# Altium PCB PCB_Luciferin_Module_V2.1_final.pcbdoc
Units mil, origin at the board's own origin, x right, y up, seen from the top; angles counter-clockwise.
Board outline 2185 x 2500 mil, 2 copper layers (Top Layer, Bottom Layer); 27 components, 50 nets, 59 pads, 48 vias.
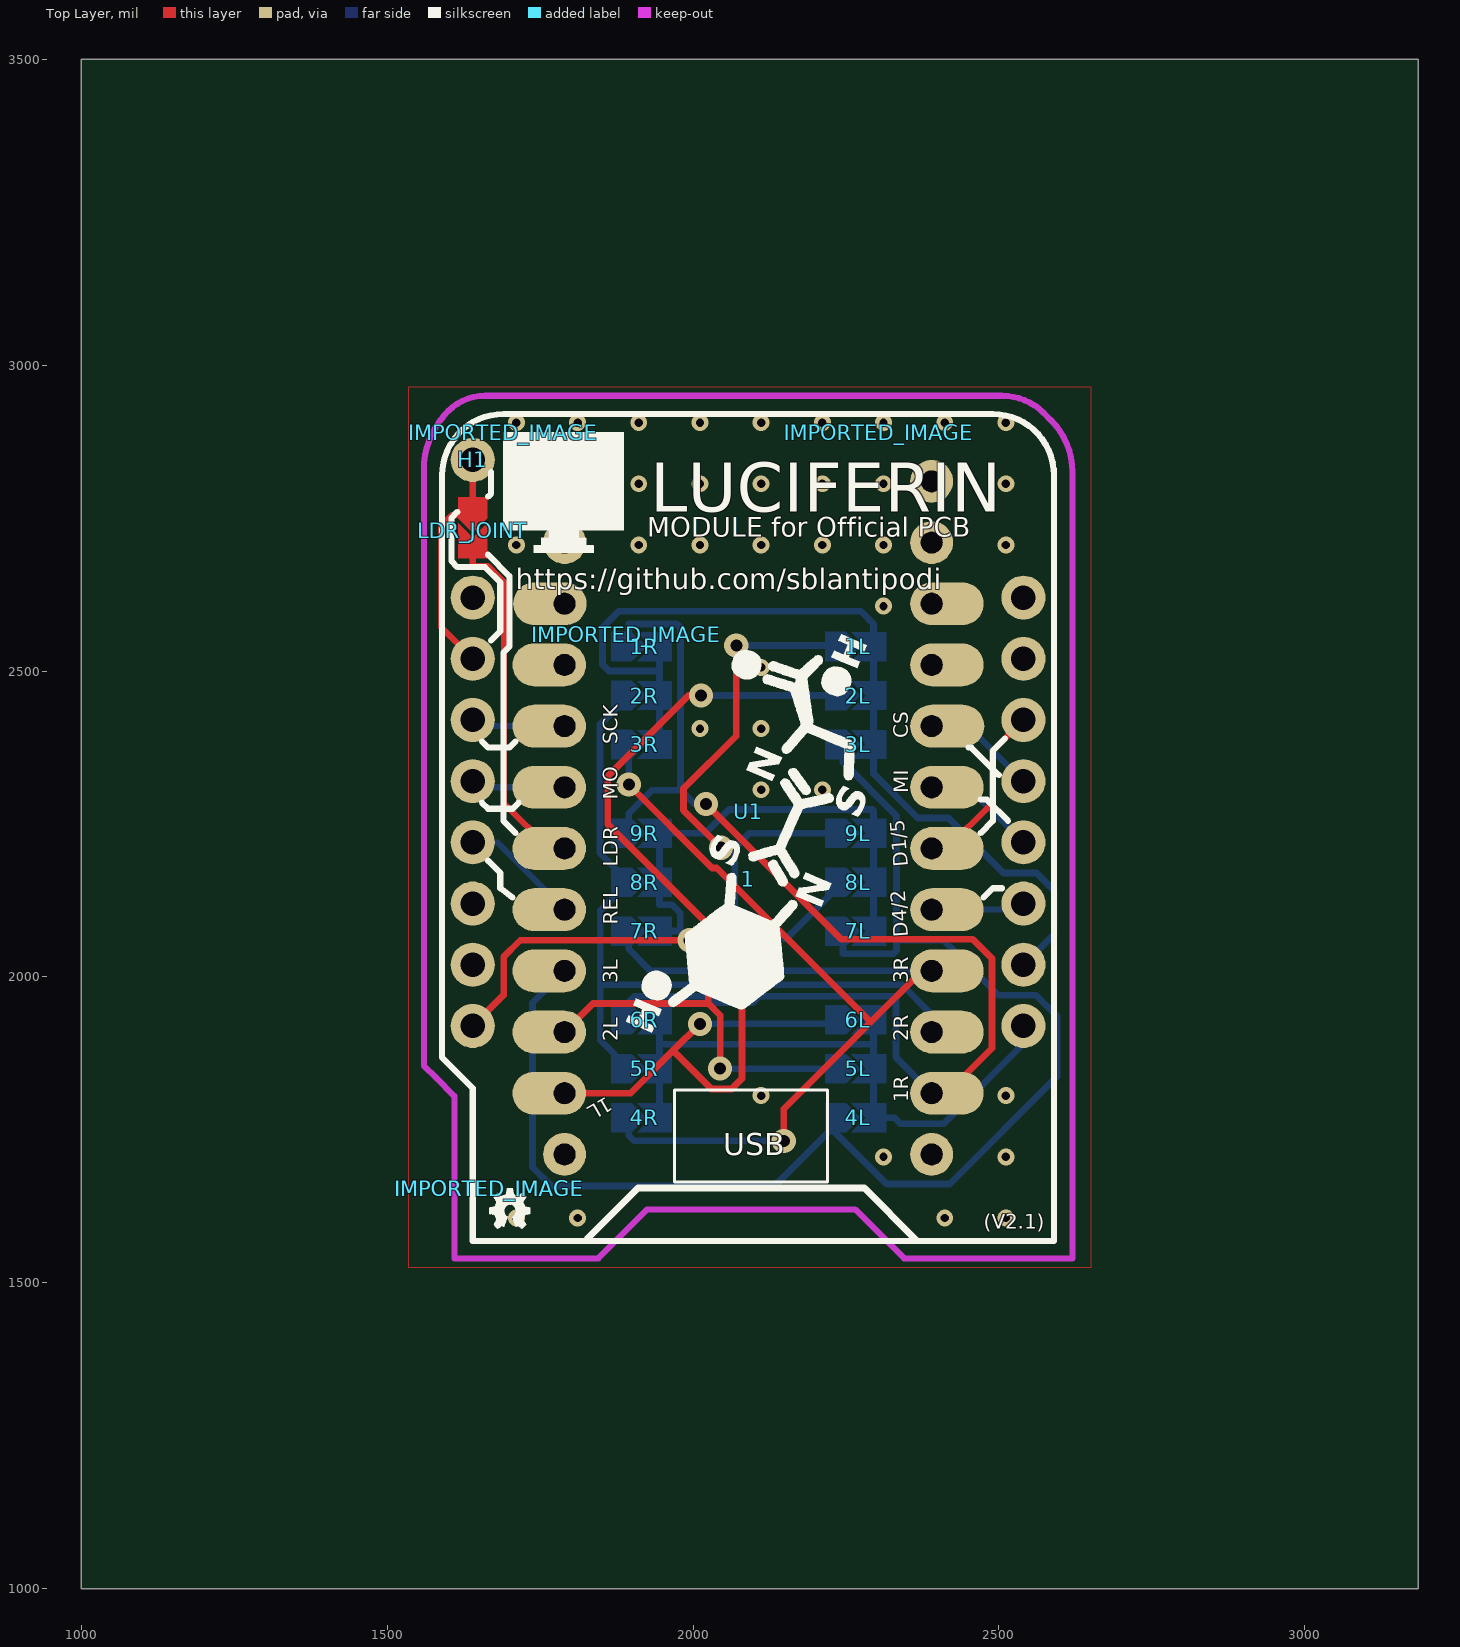
[diagram p0: Top Layer view]
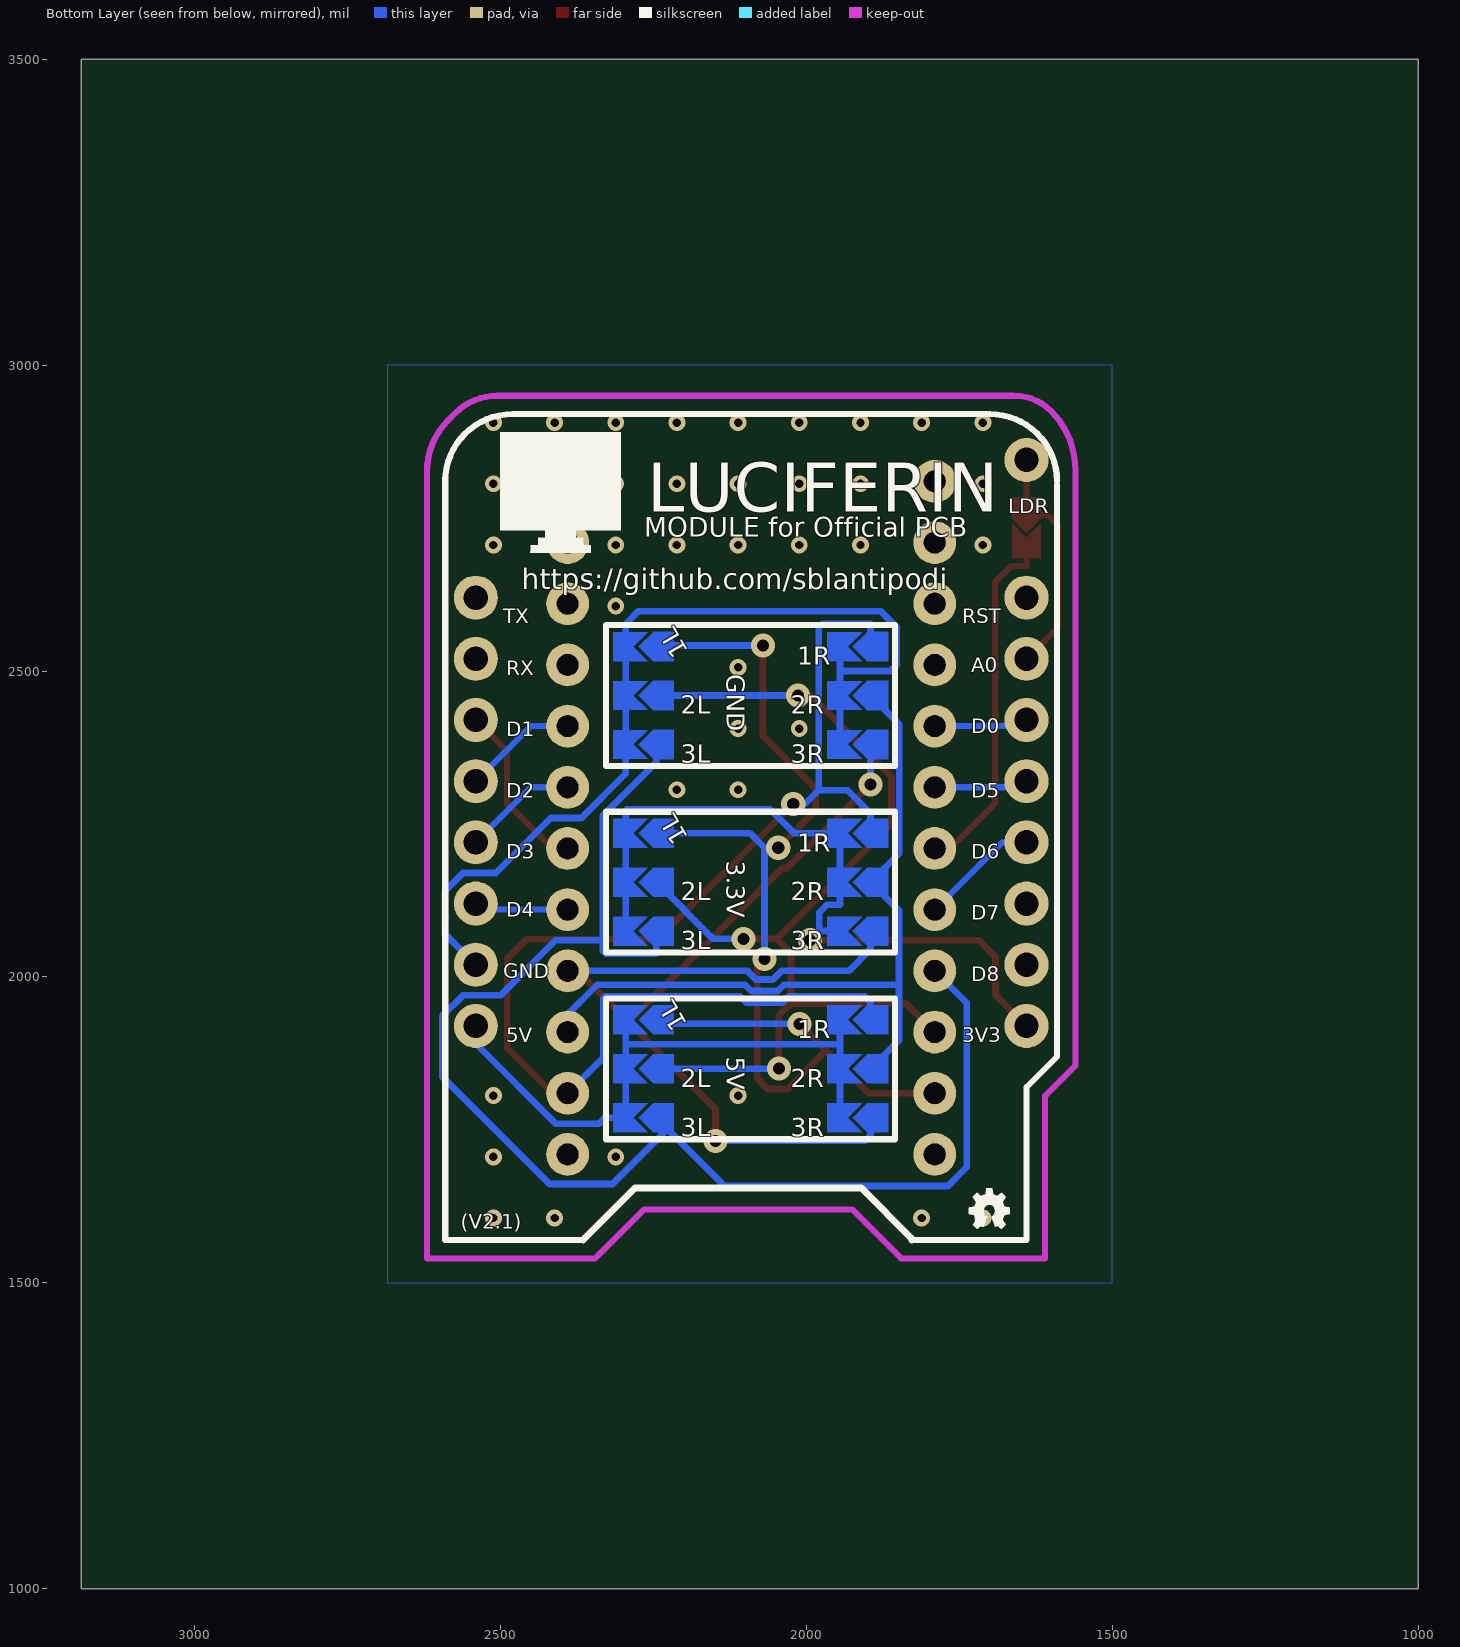
[diagram p1: Bottom Layer view, seen from below]

## Layer stack, top to bottom
Top Layer: signal copper (thickness not stored)
Dielectric: dielectric 12.6, FR-4, Dk 4.8
Bottom Layer: signal copper (thickness not stored)

## Board outline
3185,1000 1000,1000 1000,3500 3185,3500

## Components (designator, comment, footprint, x,y, rotation, side; value= is the part's Value field where it differs from the comment)
1 "SBLANT_TINYPICO_V3" TINYPICOV3 2090,2235 r90 top
1L "Solder_joint" SB_SOLDER_JOINT#1 2270,2540 r0 top
1R "Solder_joint" SB_SOLDER_JOINT#1 1920,2540 r0 top
2L "Solder_joint" SB_SOLDER_JOINT#1 2270,2460 r0 top
2R "Solder_joint" SB_SOLDER_JOINT#1 1920,2460 r0 top
3L "Solder_joint" SB_SOLDER_JOINT#1 2270,2380 r0 top
3R "Solder_joint" SB_SOLDER_JOINT#1 1920,2380 r0 top
4L "Solder_joint" SB_SOLDER_JOINT#1 2270,1770 r0 top
4R "Solder_joint" SB_SOLDER_JOINT#1 1920,1770 r0 top
5L "Solder_joint" SB_SOLDER_JOINT#1 2270,1850 r0 top
5R "Solder_joint" SB_SOLDER_JOINT#1 1920,1850 r0 top
6L "Solder_joint" SB_SOLDER_JOINT#1 2270,1930 r0 top
6R "Solder_joint" SB_SOLDER_JOINT#1 1920,1930 r0 top
7L "Solder_joint" SB_SOLDER_JOINT#1 2270,2075 r0 top
7R "Solder_joint" SB_SOLDER_JOINT#1 1920,2075 r0 top
8L "Solder_joint" SB_SOLDER_JOINT#1 2270,2155 r0 top
8R "Solder_joint" SB_SOLDER_JOINT#1 1920,2155 r0 top
9L "Solder_joint" SB_SOLDER_JOINT#1 2270,2235 r0 top
9R "Solder_joint" SB_SOLDER_JOINT#1 1920,2235 r0 top
H1 "HOLE 1.5" HOLEHOLE 1640,2845 r0 top
IMPORTED_IMAGE "IMPORTED_IMAGE" IMPORTED_IMAGE 1667.22,1655.04 r0 top
IMPORTED_IMAGE "IMPORTED_IMAGE" IMPORTED_IMAGE 2303.15,2889.96 r0 top
IMPORTED_IMAGE "IMPORTED_IMAGE" IMPORTED_IMAGE 1890.5,2560.39 r0 top
IMPORTED_IMAGE "IMPORTED_IMAGE" IMPORTED_IMAGE 1690,2889.96 r0 top
IMPORTED_IMAGE "IMPORTED_IMAGE" IMPORTED_IMAGE 1667.22,1655.04 r0 top
LDR_JOINT "Solder_joint" SB_SOLDER_JOINT#2 1640,2730 r270 top
U1 "LOLIN D1 MINI" WEMOS_D1_MINI_V2.3.0 2090,2270 r0 top

## Footprints (in the part's own frame and the unit in brackets; to place one, negate y for a bottom-side part, rotate by r counter-clockwise, add the part's x,y. Pads: shape width x height; smd on the part's side, far side on the other; paste and mask are expansions set on the pad)
HOLEHOLE [mil]
  round 72.01 hole 40 paste+0 mask+2: 1(0,0)
IMPORTED_IMAGE [mil]
SB_SOLDER_JOINT#1 [mil]
  Bottom Layer region: -19.94,-23.76 -20.08,-23.82 -53.54,-23.82 -53.68,-23.76 -53.74,-23.62 -53.74,23.62 -53.68,23.76 -53.54,23.82 -20.08,23.82 -19.94,23.76 3.68,0.14 3.74,0 3.68,-0.14
  Bottom Layer region: 45.51,-23.62 45.51,23.62 45.51,23.62 -11.26,23.62 -11.26,23.62 12.36,0 12.36,0 -11.26,-23.62 -11.26,-23.62
SB_SOLDER_JOINT#2 [mil]
  Top Layer region: -19.94,-23.76 -20.08,-23.82 -53.54,-23.82 -53.68,-23.76 -53.74,-23.62 -53.74,23.62 -53.68,23.76 -53.54,23.82 -20.08,23.82 -19.94,23.76 3.68,0.14 3.74,0 3.68,-0.14
  Top Layer region: 45.51,-23.62 45.51,23.62 45.51,23.62 -11.26,23.62 -11.26,23.62 12.36,0 12.36,0 -11.26,-23.62 -11.26,-23.62
TINYPICOV3 [mil]
  round 70 hole 35.44 slot 35.45 at 0 deg paste+0 mask+2: 3V3(-225,300) 4(-125,300) 5(-225,-300) 5V(-325,300) 14(-25,300) 15(75,300) 18(-325,-300) 19(-425,-300) 21(-25,-300) 22(-125,-300) 23(-525,-300) 25(375,300) 26(275,300) 27(175,300) 32(75,-300) 33(175,-300) BAT(-525,300) GND1(-425,300) GND2(375,-300) RST(275,-300)
  oval 70x120 smd paste+0 mask+2: 3V3(-225,325) 4(-125,325) 5(-225,-325) 5V(-325,325) 14(-25,325) 15(75,325) 18(-325,-325) 19(-425,-325) 21(-25,-325) 22(-125,-325) 25(375,324) 26(275,325) 27(175,325) 32(75,-325) 33(175,-326) GND1(-425,325) GND2(375,-325) RST(275,-325)
  silkscreen extent -570,-130 -420,120
WEMOS_D1_MINI_V2.3.0 [mil]
  round 72 hole 40 paste+0 mask+4: 3V3(-450,-350) 5V(450,-350) A0(-450,250) D0(-450,150) D1(450,150) D2(450,50) D3(450,-50) D4(450,-150) D5(-450,50) D6(-450,-50) D7(-450,-150) D8(-450,-250) GND(450,-250) RST(-450,350) RX(450,250) TX(450,350)
  silkscreen extent -500,-702 500,650

## Free pads (board coordinates)
  round 70 hole 35.44 slot 35.45 at 90 deg paste+0 mask+2: 25(1790,2810) 26(1790,2710) GND2(2390,2810) RST(2390,2710)

## Via types
v1: diameter 27.56, hole 13.78, Top Layer to Bottom Layer, tented both sides, 37 vias
v2: diameter 39.37, hole 19.69, Top Layer to Bottom Layer, tented both sides, 11 vias

## Nets (pads, with @x,y where several pads share a name; then routed paths per layer and width w, separated by ;. In a path a pad name is that pad's centre, name@x,y a point inside that pad or via, vN(x,y) a via of type N, cw(c..) or ccw(c..) an arc to the next point about the centre after c; other vN are vias at no path point)
1_14: 1.14 | length 586.5
  Top Layer w10: 1640,2705 1640,2671.6 1665.05,2671.6 1690.98,2645.67 1690.98,2284.02 1765,2210 1.14@1790,2210
1_15: 1.15 U1.D5 | length 179.1
  Top Layer w10: 1.15@1765,2310 1.15@1790,2310
  Bottom Layer w10: U1.D5 1650,2310 1.15@1790,2310
1_23: 1.23
1_26: 1.26 | length 25
  Top Layer w10: 1.26@1765,2510 1.26@1790,2510
1_27: 1.27 U1.D0 | length 179.1
  Top Layer w10: 1.27@1765,2410 1.27@1790,2410
  Bottom Layer w10: U1.D0 1650,2410 1.27@1790,2410
1_32: 1.32 U1.D3 | length 212.3
  Top Layer w10: 1.32@2390,2310 1.32@2415,2310
  Bottom Layer w10: 1.32@2390,2310 2450,2310 U1.D3
1_33: 1.33 U1.D2 | length 213.3
  Top Layer w10: 1.33@2390,2410 1.33@2416,2410
  Bottom Layer w10: 1.33@2390,2410 2450,2410 U1.D2
1_BAT: 1.BAT
1_RST: 1.RST | length 25
  Top Layer w10: 1.RST@2390,2510 1.RST@2415,2510
NC1: pad.25
NC2: pad.GND2
NC3: pad.26
NC4: pad.RST
NC5: 1.25 | length 24
  Top Layer w10: 1.25@1766,2610 1.25@1790,2610
NC6: 1.GND2 | length 25
  Top Layer w10: 1.GND2@2390,2610 1.GND2@2415,2610
S$5398: 
S$5402: 
S$5406: 
S$5410: 
S$5474: 
S$5482: 
S$5486: 
S$7155: 
S$12763: 
S$13149: 
S$13153: 
S$16003: 
S$16040: 
S$16077: 
S$16090: 
S$20682: 
S$86624: 
SJ_5V_1_LEFT_1: 1.GND1 | length 1832.8
  Top Layer w11.02: 1.GND1@1765,1810 1790,1810 1897.89,1810 1967.57,1879.68 ; v2(2011.22,1923.33) 1967.57,1879.68 ; v2(2045.75,2211.16) 1984.51,2272.4 1984.51,2307.84 2070.68,2394.01 v2(2070.68,2541.63) ; v2(2068.32,2029.13) 2079.98,2017.47 2079.98,1833.96 2063.06,1817.04 2030.2,1817.04 1967.57,1879.68
  Bottom Layer w11.02: v2(2011.22,1923.33) 2238.33,1923.33 2245,1930 ; v2(2045.75,2211.16) 2068.32,2211.16 ; v2(2068.32,2029.13) 2068.32,2211.16 ; v2(2070.68,2541.63) 2243.37,2541.63 2245,2540 ; 2245,2235 2092.16,2235 2068.32,2211.16
SJ_5V_2_LEFT_1: 1.5V | length 1727.6
  Top Layer w11.02: 1.5V@1765,1910 1790,1910 1836.68,1956.68 2025.05,1956.68 ; v2(2013.23,2460) 1992.54,2460 1860.5,2327.96 1860.5,2249.94 2048.17,2062.27 ; v2(2044.36,1850.18) 2044.36,1937.37 2025.05,1956.68 ; v2(2102.36,2062.27) 2048.17,2062.27 ; 2025.05,1956.68 2025.05,2039.15 2048.17,2062.27
  Bottom Layer w11.02: v2(2013.23,2460) 2245,2460 ; v2(2044.36,1850.18) 2244.82,1850.18 2245,1850 ; v2(2102.36,2062.27) 2152.27,2062.27 2245,2155
SJ_5V_3_LEFT_1: 1.3V3 | length 2324.7
  Top Layer w11.02: 1.3V3@1765,2010 1.3V3@1790,2010
  Bottom Layer w11.02: 1.3V3@1790,2010 1737.79,1957.79 1737.79,1689.02 1768.34,1658.47 2133.47,1658.47 2226.44,1751.44 ; 2245,1770 2226.44,1751.44 ; 2245,2075 2245,2038.22 2245.29,2037.93 2327.52,2037.93 2332.71,2043.12 2332.71,2060 ; 2245,2380 2245,2351.12 2332.71,2263.41 2332.71,2060 ; 2226.44,1751.44 2316.33,1661.55 2419.56,1661.55 2594.99,1836.98 2594.99,1935.94 2560.93,1970 2499.68,1970 2409.68,2060 2332.71,2060
SJ_GND_1_RIGHT_1: 1.19 | length 2079.5
  Top Layer w11.02: v2(2021.23,2283.02) 2242.76,2061.49 2457.31,2061.49 2488.45,2030.35 2488.45,1883.45 2415,1810 1.19@2390,1810
  Bottom Layer w11.02: 1895,1930 1895,1958.89 1904.46,1968.35 2028.68,1968.35 2038.93,1958.1 2097.72,1958.1 2107.97,1968.35 2328.42,1968.35 2331.63,1965.14 2331.63,1868.37 1.19@2390,1810 ; 1895,2235 1895,2267.48 1932.7,2305.18 1978.94,2305.19 1979.57,2305.82 ; 1895,2540 1895,2576.78 1895.29,2577.07 1973.61,2577.07 1979.57,2571.11 1979.57,2305.82 ; v2(2021.23,2283.02) 2002.37,2283.02 1979.57,2305.82
SJ_GND_2_RIGHT_1: 1.18 | length 1311.5
  Top Layer w11.02: 1.18@2390,1910 1.18@2415,1910
  Bottom Layer w11.02: 1895,1850 1848.5,1896.5 1848.5,1987.31 ; 1895,2460 1847.83,2412.83 1847.83,2202.17 1895,2155 1848.5,2108.5 1848.5,1987.31 ; 1.18@2390,1910 2390,1938.86 2341.55,1987.31 2100.14,1987.31 2089.88,1977.05 2046.77,1977.05 2036.51,1987.31 1848.5,1987.31
SJ_GND_3_RIGHT_1: 1.5 | length 1870.8
  Top Layer w11.02: v2(1895,2314.33) 2031.3,2178.03 2038.76,2178.03 2290.42,1926.37 ; v2(2148.25,1732.17) 2148.25,1784.2 2290.42,1926.37 ; 1.5@2415,2010 2390,2010 2374.05,2010 2290.42,1926.37
  Bottom Layer w11.02: 1895,1770 1895,1741.11 1903.94,1732.17 v2(2148.25,1732.17) ; 1895,2075 1895,2045.4 1930.4,2010 2040.61,2010 2054.61,1996 2082.04,1996 2096.04,2010 1.5@2390,2010 ; v2(1895,2314.33) 1895,2380
U1_3V3: U1.3V3 | length 1287.6
  Top Layer w11.02: U1.3V3 1690.5,1970.5 1690.5,2032.93 1717.57,2060 v2(1993.91,2060)
  Bottom Layer w11.02: v2(1993.91,2060) 1978.91,2075 ; 2295,2075 2295,2155 2295,2235 2295,2272.02 2293.28,2273.74 2058.8,2273.74 2020.06,2235 1978.91,2235 1945,2235 1945,2155 1945,2117.98 1965.89,2117.98 1978.91,2104.96 1978.91,2075 ; 1978.91,2075 1945,2075 1978.91,2075
U1_5V: U1.5V | length 1002.5
  Bottom Layer w11.02: 1945,1770 1945,1850 1945,1890 ; 1945,1930 1945,1890 ; 2295,1930 2295,1890 ; U1.5V 2540,1890.78 2409.22,1760 2338.91,1760 2328.91,1770 2295,1770 2295,1850 2295,1890 ; 1945,1890 2295,1890
U1_A0: H1.1 U1.A0 | length 387.7
  Top Layer w10: U1.A0 1588.49,2571.51 1588.49,2737.67 1605.82,2755 1640,2755 H1.1
U1_D1: 1.21 U1.D1 | length 286.8
  Top Layer w10: 1.21@2390,2210 2415,2210 2488.93,2283.93 2488.93,2368.94 U1.D1
U1_D4: 1.22 U1.D4 | length 179.1
  Top Layer w10: 1.22@2390,2110 1.22@2415,2110
  Bottom Layer w10: 1.22@2390,2110 2530,2110 U1.D4
U1_D6: 1.4 U1.D6 | length 220.6
  Top Layer w10: 1.4@1765,2110 1.4@1790,2110
  Bottom Layer w10: U1.D6 1680,2220 1.4@1790,2110
U1_D7: U1.D7
U1_D8: U1.D8
U1_GND: U1.GND | length 1541.9
  Bottom Layer w11.02: 1945,2380 1945,2460 1945,2500 ; 1945,2540 1945,2500 ; U1.GND 2590.55,2070.55 2590.55,2140.73 2561.28,2170 2507.5,2170 2417.5,2260 2367.21,2260 2295,2332.21 2295,2380 2295,2460 2295,2540 2295,2577.02 2274.17,2597.85 1878.77,2597.85 1851.94,2571.02 1851.94,2510.77 1862.71,2500 1945,2500
  other v1: 1711.33,1606.02 1811.33,1606.02 2411.33,1606.02 2511.33,1606.02 2311.33,1706.02 2511.33,1706.02 2111.33,1806.02 2511.33,1806.02 2111.33,2306.02 2211.33,2306.02 2011.33,2406.02 2111.33,2406.02 2111.33,2506.02 2311.33,2606.02 1711.33,2706.02 1911.33,2706.02 2011.33,2706.02 2111.33,2706.02 2211.33,2706.02 2311.33,2706.02 2511.33,2706.02 1711.33,2806.02 1911.33,2806.02 2011.33,2806.02 2111.33,2806.02 2211.33,2806.02 2311.33,2806.02 2511.33,2806.02 1711.33,2906.02 1811.33,2906.02 1911.33,2906.02 2011.33,2906.02 2111.33,2906.02 2211.33,2906.02 2311.33,2906.02 2411.33,2906.02 2511.33,2906.02
U1_RST: U1.RST
U1_RX: U1.RX
U1_TX: U1.TX

## Polygon pours and split planes (outlines as drawn)
U1_GND on Bottom Layer (solid): 1500,3000 2685,3000 2685,1500 1500,1500
U1_GND on Top Layer (solid): 1535,2965 2650,2965 2650,1525 1535,1525

## Keep-outs
Keep-Out Layer:
  lines w10 net S$16040: 1560,2828.43 cw(c1696.57,2828.43) 1600,2925 cw(c1660.36,2864.64) 1660.36,2950 ; 2505,2950 cw(c2505,2853.43) 2573.28,2921.72 ; 2585,2910 cw(c2500.5,2825.5) 2620,2825.5

## Silkscreen, mask and mechanical layers (free items; w line width, h text height)
Top Overlay:
  lines w10 net S$13149: 2470,2235 2490,2255 2490,2370 2510,2390
  lines w10 net S$13153: 2475,2130 2490,2145 2505,2145
  lines w10 net S$5398: 1655,2385 1665,2375 1700,2375 1710,2385
  lines w10 net S$5402: 1655,2285 1665,2275 1705,2275 1715,2285
  lines w10 net S$5406: 2450,2375 2455,2375 2500,2330
  lines w10 net S$5410: 2470,2290 2480,2290 2515,2255
  lines w10 net S$5474: 1665,2785 1670,2790 1670,2825
  lines w10 net S$5482: 1665,2690 1700,2655 1700,2540 1690,2530 1690,2255 1710,2235 ; 1710,2235 1710,2235
  lines w10 net S$5486: 1625,2670 1660,2670 1685,2645 1685,2565 1670,2550
  lines w10 net S$7155: 1615,2760 1605,2750 1605,2680 1615,2670 1625,2670
  lines w10 net U1_D6: 1665,2190 1685,2170 1685,2145 1705,2130
  lines w11.02 net S$86624: 1827.7,1570 1827.7,1572.7 1910,1655 2280,1655 2364.7,1570
  text "LUCIFERIN" at 1930,2760 h80
  text "MODULE for Official PCB" at 1925,2719.25 h31.5
  text "https://github.com/sblantipodi" at 1710,2633.27 h33.47
  text "CS" at 2351.81,2390 h23.62 r90
  text "SCK" at 1876.81,2380 h23.62 r90
  text "MI" at 2351.81,2300 h23.62 r90
  text "MO" at 1876.81,2290 h23.62 r90
  text "D1/5" at 2351.77,2181.03 h23.62 r95
  text "LDR" at 1876.81,2180 h23.62 r90
  text "REL" at 1876.81,2085 h23.62 r90
  text "D4/2" at 2351.78,2065.82 h23.62 r94
  text "3L" at 1876.81,1990 h23.62 r90
  text "3R" at 2351.81,1990 h23.62 r90
  text "2L" at 1876.81,1895 h23.62 r90
  text "2R" at 2351.81,1895 h23.62 r90
  text "1L" at 1859.09,1805.23 h23.62 r210
  text "1R" at 2351.81,1795 h23.62 r90
  text "(V2.1)" at 2475,1588.19 h23.62
Bottom Overlay:
  lines w10: 1855,1734.68 2327.44,1734.68 2327.44,1965 1855,1965 1855,1734.68 ; 1855,2039.68 2327.44,2039.68 2327.44,2270 1855,2270 1855,2039.68 ; 1855,2344.68 2327.44,2344.68 2327.44,2575 1855,2575 1855,2344.68
  lines w10 net S$12763: 1590,2810 cw(c1700,2810) 1700,2920 ; 1705,2920 2460,2920 ; 2365,1570 2590,1570 2590,2815 ; 2440,2920 2480,2920 cw(c2480,2810) 2590,2810
  lines w10 net S$16090: 1590,2805 1590,1870 1640,1820 1640,1570 1827.7,1570
  lines w11.02 net S$86624: 1827.7,1570 1827.7,1572.7 1910,1655 2280,1655 2364.7,1570
  text "LUCIFERIN" at 2260,2760 h80
  text "LDR" at 1670,2758.19 h23.62
  text "MODULE for Official PCB" at 2265,2719.25 h31.5
  text "https://github.com/sblantipodi" at 2465,2633.27 h33.47
  text "GND" at 2130,2495 h30 r90
  text "1L" at 2192.01,2227.5 h30 r240
  text "1R" at 2015,2205 h30
  text "3.3V" at 2130,2190 h30 r90
  text "2R" at 2025,2125 h30
  text "2L" at 2205,2125 h30
  text "3R" at 2025,2045 h30
  text "3L" at 2205,2045 h30
  text "1L" at 2193.27,1922.9 h30 r240
  text "1R" at 2015,1900 h30
  text "5V" at 2130,1870 h30 r90
  text "2R" at 2025,1820 h30
  text "2L" at 2205,1820 h30
  text "3R" at 2025,1740 h30
  text "3L" at 2205,1740 h30
  text "(V2.1)" at 2565,1588.19 h23.62
Document:
  lines w0.1: 2092.49,2249.99 2092.51,2250.01

## Text inside footprints (layer, text, board x,y; h text height)
1: Top Overlay "USB" at 2049.5,1708.5 h36
U1: Bottom Overlay "D8" at 1730,1993.19 h23.62; Bottom Overlay "D7" at 1730,2093.19 h23.62; Bottom Overlay "D6" at 1730,2193.19 h23.62; Bottom Overlay "D5" at 1730,2293.19 h23.62; Bottom Overlay "D0" at 1730,2398.19 h23.62; Bottom Overlay "A0" at 1730,2498.19 h23.62; Bottom Overlay "RST" at 1745,2578.19 h23.62; Bottom Overlay "3V3" at 1745,1893.19 h23.62; Bottom Overlay "5V" at 2490,1893.19 h23.62; Bottom Overlay "GND" at 2495,1998.19 h23.62; Bottom Overlay "D4" at 2490,2098.19 h23.62; Bottom Overlay "D3" at 2490,2193.19 h23.62; Bottom Overlay "D2" at 2490,2293.19 h23.62; Bottom Overlay "D1" at 2490,2393.19 h23.62; Bottom Overlay "RX" at 2490,2493.19 h23.62; Bottom Overlay "TX" at 2495,2578.19 h23.62